# EAGLE board ROBOT_PI v9 (EAGLE 9.7.0)
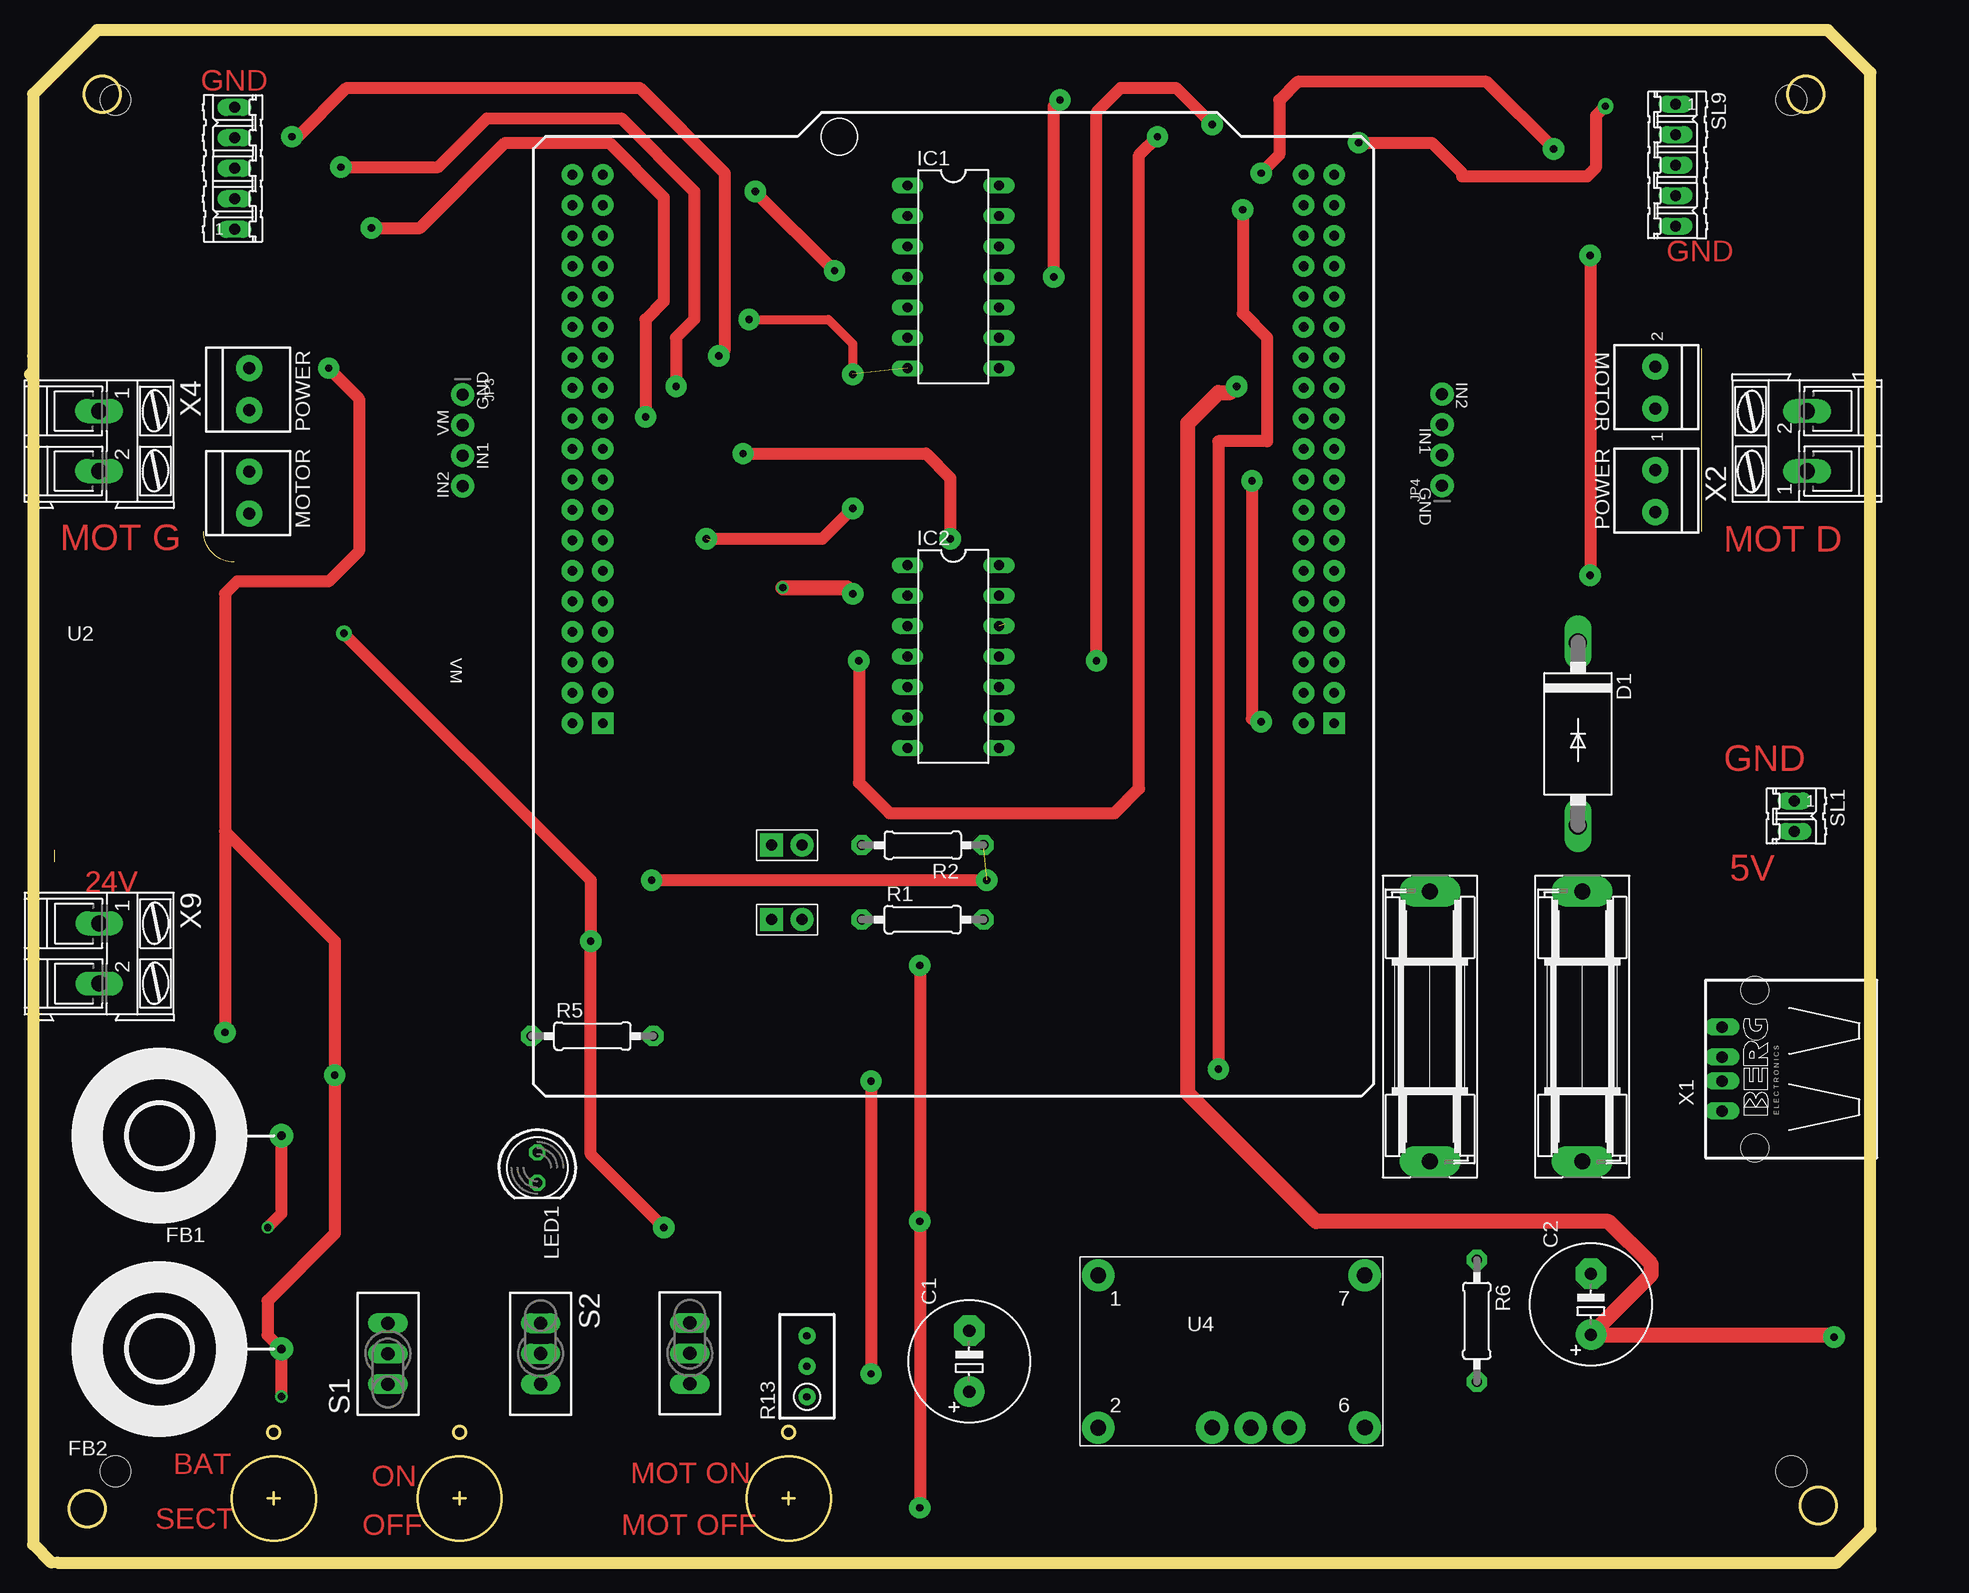
[diagram p0: board, top side]
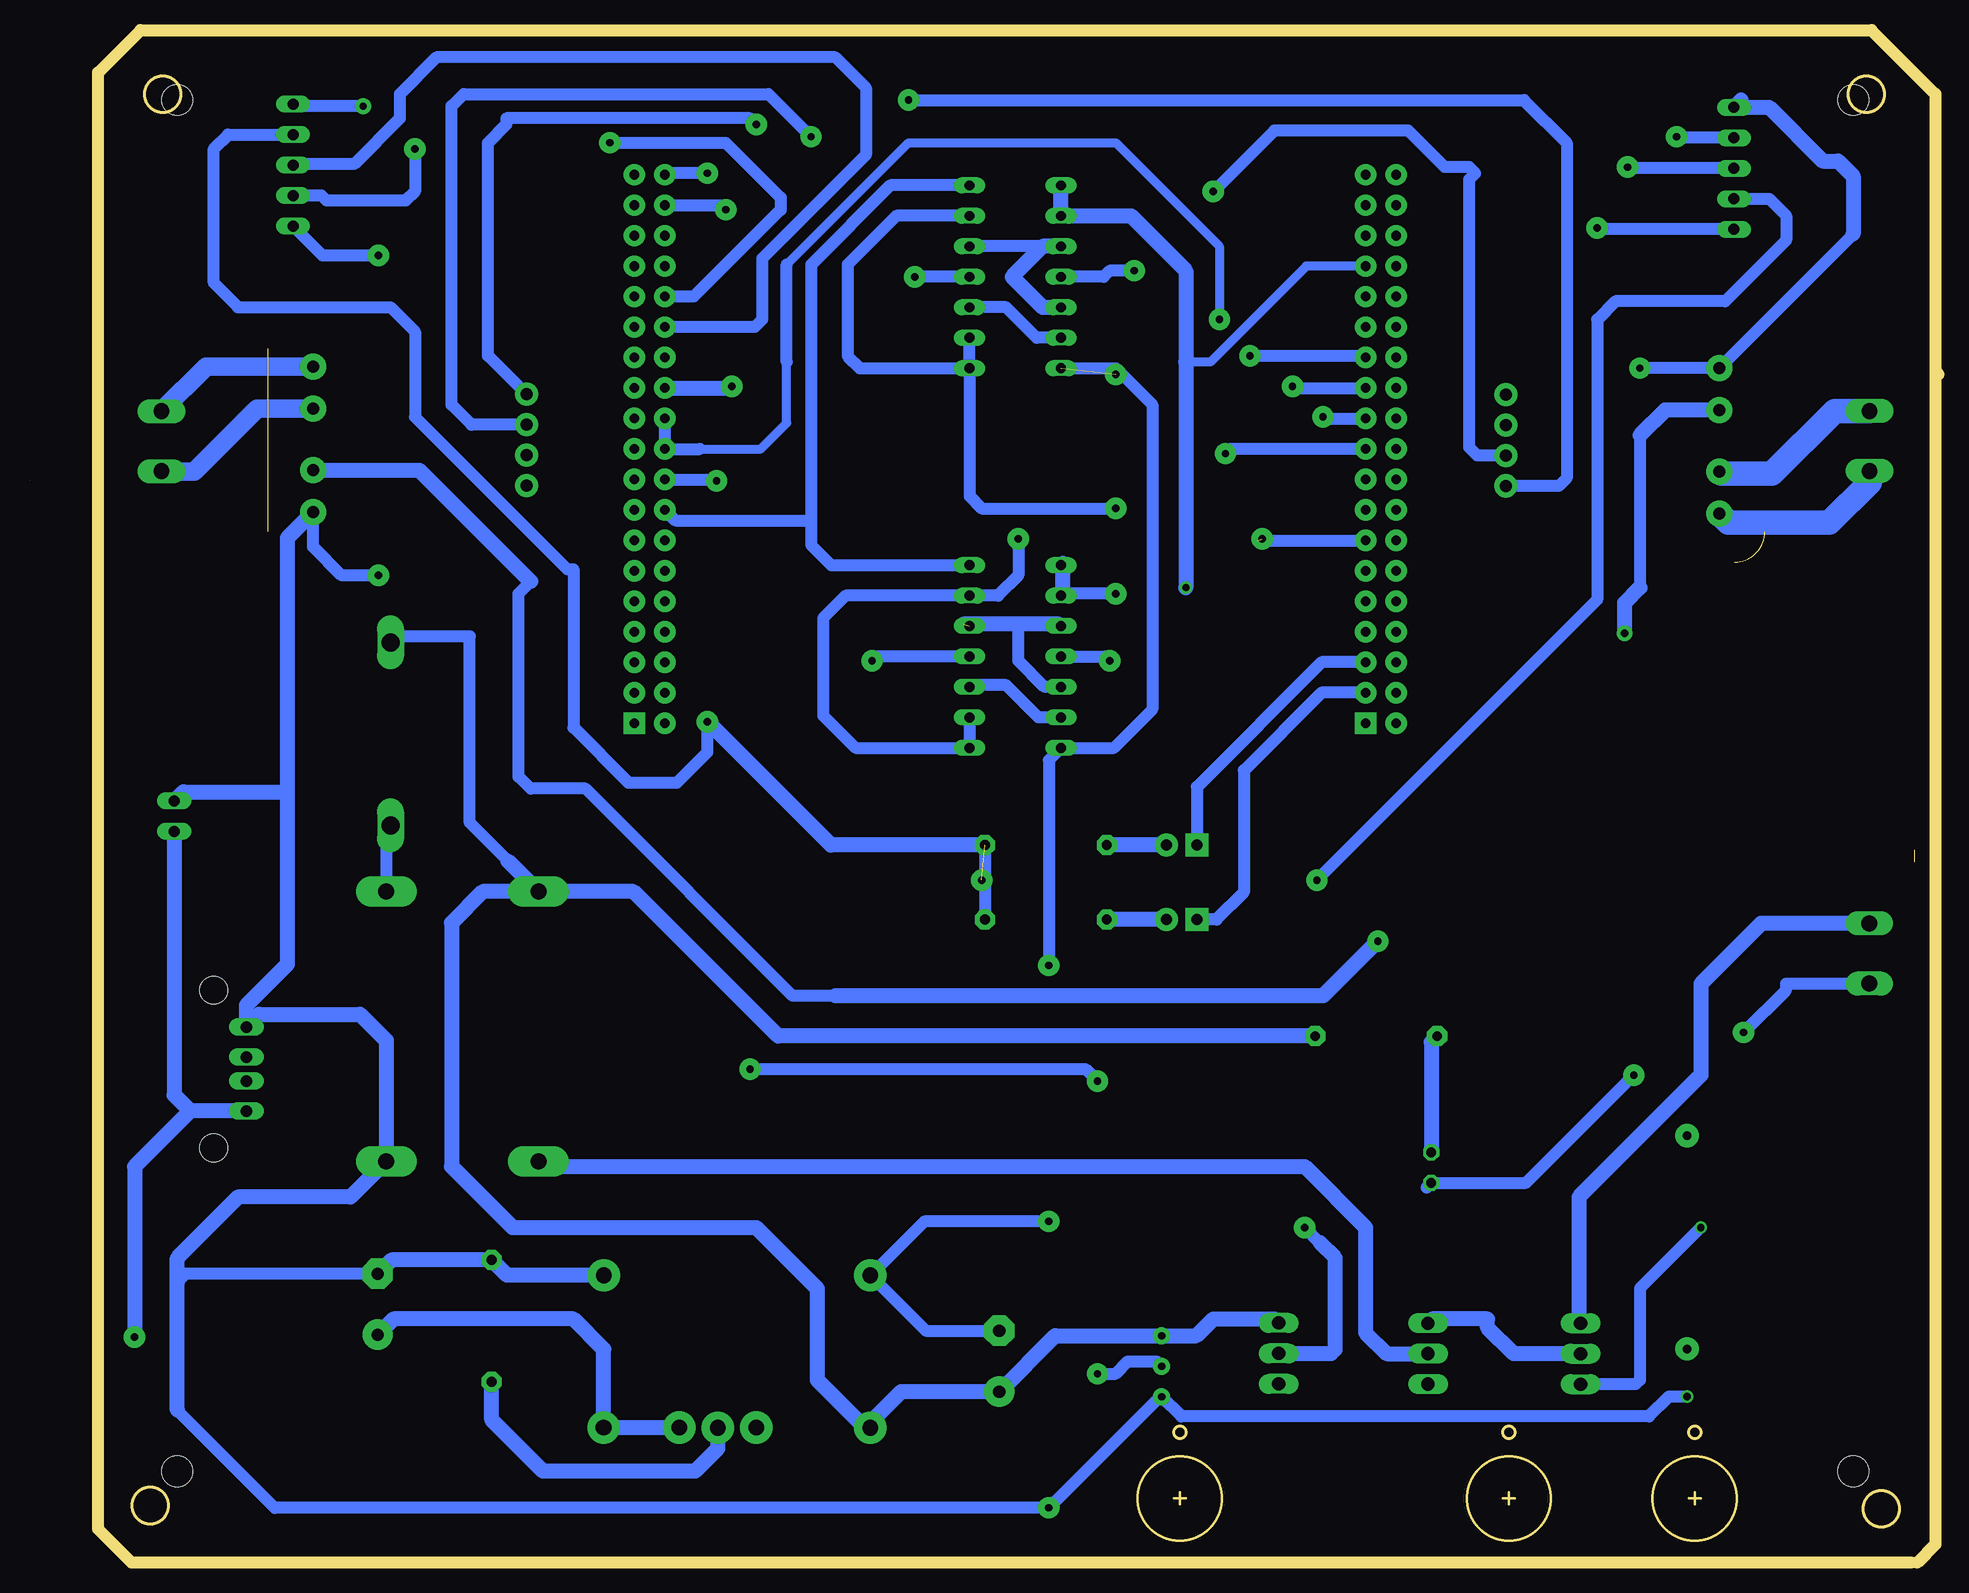
[diagram p1: board, bottom side, seen from below]

Size 153.42 x 127.76 mm. Coordinates in mm from the lower left corner, seen from the top.
Outline: 2.03,59.42 2.03,58.42
Outline: 17.01,83.41 arc-90 14.47,85.95
Outline: 139.29,101.21 139.29,85.97
Outline: 20.32,5.85 20.32,4.85
Outline: 19.82,5.35 20.82,5.35
Outline: 35.81,5.85 35.81,4.85
Outline: 35.31,5.35 36.31,5.35
Outline: 63.25,5.85 63.25,4.85
Outline: 62.75,5.35 63.75,5.35
Outline: 0.25,100.58 0.25,1.52 1.78,0
Outline: 2.29,0 150.62,0 153.42,2.79 153.42,124.21 149.86,127.76 5.59,127.76 0.25,122.43 0.25,99.31 0,99.06
Outline: circle at 6.03,122.42 radius 1.5
Outline: circle at 148.03,122.42 radius 1.5
Outline: circle at 149.05,4.76 radius 1.5
Outline: circle at 4.76,4.51 radius 1.5
Outline: circle at 20.32,5.35 radius 3.5
Outline: circle at 20.32,10.85 radius 0.5
Outline: circle at 35.81,5.35 radius 3.5
Outline: circle at 35.81,10.85 radius 0.5
Outline: circle at 63.25,5.35 radius 3.5
Outline: circle at 63.25,10.85 radius 0.5
Copper layers (1*16): Top / Bottom
Stack-up Default Layer Stack: Top User Defined 0.035mm / Dielectric-1 User Defined 1.5mm / Bottom User Defined 0.035mm
Design rules "default": minimum track width 10mil, minimum drill 24mil, track to track 8mil, track to pad 8mil, pad to pad 8mil, via to via 8mil, smd to smd 8mil, copper to edge 40mil, drill to drill 8mil, minimum pad ring 10mil, minimum via ring 8mil, stop-mask expansion 4mil, vias tented up to drill 0mil, thermal gap 10mil
Holes 2.54 mm at 146.81,7.62 7.11,7.62 7.11,121.92 146.81,121.92

## Footprints (pad centres in the part's own frame; a part is rotated, then mirrored left to right if it is on the bottom)
E5-10,5 = drill 1.016 pad 2.54: + -2.54,0 | drill 1.016 pad 2.54 octagon: - 2.54,0
CAVALIER = drill 0.9 pad 1.93 square: 1 -1.27,0 | drill 0.9 pad 1.93: 2 1.27,0
DO201-15 = drill 1.499 long: A 7.62,0; C -7.62,0
SH22,5 = drill 1.321 pad 2.54 long: 1 -11.252,0; 2 11.252,0
F_BANANE = drill 0.7 pad 1.93: P$1 -10.16,0
DIL14 = drill 0.813 long: 1 -7.62,-3.81; 2 -5.08,-3.81; 3 -2.54,-3.81; 4 0,-3.81; 5 2.54,-3.81; 6 5.08,-3.81; 7 7.62,-3.81; 8 7.62,3.81; 9 5.08,3.81; 10 2.54,3.81; 11 0,3.81; 12 -2.54,3.81; 13 -5.08,3.81; 14 -7.62,3.81
1X04_ROUND_76 = drill 1 pad 1.93: 1 -3.81,0; 2 -1.27,0; 3 1.27,0; 4 3.81,0
LED5MM = drill 0.813 octagon: A -1.27,0; K 1.27,0
0207/10 = drill 0.813 pad 1.676 octagon: 1 -5.08,0; 2 5.08,0
RTRIM3296W = drill 0.61 pad 1.422: 1 0,-2.54; 2 0,0; 3 0,2.54
TL3XPO = drill 1.1 pad 1.422 long: 1 -2.54,0; 2 0,0; 3 2.54,0
02P = drill 0.914 long: 1 -1.27,0; 2 1.27,0
05P = drill 0.914 long: 1 -5.08,0; 2 -2.54,0; 3 0,0; 4 2.54,0; 5 5.08,0
P_NUCLEO = drill 0.8 pad 1.778: +3V3 -29.21,-8.89; +5V -29.21,-11.43; AGND 31.75,-29.21; AVDD 29.21,1.27; BOOTO -31.75,1.27; E5V -29.21,3.81; GND -29.21,1.27; GND' -29.21,-16.51; GND'' -29.21,-13.97; GND''' -31.75,-13.97; IOREF -29.21,-3.81; NC -29.21,-21.59; P$18 -31.75,-3.81; P$19 -31.75,-1.27; P$27 -29.21,-1.27; P$48 29.21,-1.27; P$74 31.75,-34.29; P$76 31.75,-36.83; PA0 -29.21,-24.13; PA1 -29.21,-26.67; PA2 29.21,-34.29; PA3 29.21,-36.83; PA4 -29.21,-29.21; PA5 29.21,-3.81; PA6 29.21,-6.35; PA7 29.21,-8.89; PA8 29.21,-19.05; PA9 29.21,-16.51; PA10 29.21,-31.75; PA11 31.75,-6.35; PA12 31.75,-3.81; PA13 -31.75,-6.35; PA14 -31.75,-8.89; PA15 -31.75,-11.43; PB0 -29.21,-31.75; PB1 31.75,-19.05; PB2 31.75,-16.51; PB3 29.21,-29.21; PB4 29.21,-24.13; PB5 29.21,-26.67; PB6 29.21,-11.43; PB7 -31.75,-16.51; PB8 29.21,6.35; PB9 29.21,3.81; PB10 29.21,-21.59; PB12 31.75,-8.89; PB13 31.75,-26.67; PB14 31.75,-24.13; PB15 31.75,-21.59; PB110 31.75,-11.43; PB120 31.75,-13.97; PC0 -29.21,-36.83; PC1 -29.21,-34.29; PC2 -31.75,-34.29; PC3 -31.75,-36.83; PC4 31.75,-31.75; PC5 31.75,3.81; PC6 31.75,6.35; PC7 29.21,-13.97; PC8 31.75,8.89; PC11 -29.21,8.89; PC12 -31.75,6.35; PC13 -31.75,-19.05; PC14 -31.75,-21.59; PC15 -31.75,-24.13; PD2 -29.21,6.35; PD8 31.75,-1.27; PH0 -31.75,-26.67; PH1 -31.75,-29.21; RESET -29.21,-6.35; U5V 31.75,1.27; VBAT -31.75,-31.75; VDD -31.75,3.81; VIN -29.21,-19.05 | drill 0.8 pad 1.778 square: PC9 29.21,8.89; PC10 -31.75,8.89
PTN78060 = drill 1.3 pad 2.7: 1 -11.12,6.36; 2 -11.11,-6.35; 3 -1.6,-6.34; 4 1.61,-6.35; 5 4.8,-6.34; 6 11.12,-6.34; 7 11.11,6.36
PN87520 = drill 0.95 long: 1 -3.5,2.71; 2 -1,2.71; 3 1,2.71; 4 3.5,2.71 | hole 2.3: -6.57,0; 6.57,0
AK300/2 = drill 1.321 long: 1 -2.515,0; 2 2.489,0
TERMBLOCK_1X2-3.5MM = drill 1 pad 2.184: 1 1.8,0; 2 -1.7,0

## Placement (x,y rotation side)
C1  220u  [E5-10,5]  78.29,16.79 90 top
C2  220u  [E5-10,5]  130.11,21.54 90 top
CV1  [CAVALIER]  63.09,53.61 0 top
CV2  [CAVALIER]  63.09,59.81 0 top
D1  1N5624  [DO201-15]  129.03,69.09 270 top
F1  [SH22,5]  116.69,44.69 90 top
F2  [SH22,5]  129.39,44.69 90 top
FB1  SECTEUR  [F_BANANE]  10.8,35.59 180 top
FB2  SECTEUR  [F_BANANE]  10.8,17.81 180 top
IC1  4011N  [DIL14]  76.96,107.19 270 top
IC2  4011N  [DIL14]  76.96,75.54 270 top
JP3  [1X04_ROUND_76]  36.06,93.57 270 top
JP4  [1X04_ROUND_76]  117.7,93.59 90 top
LED1  24V  [LED5MM]  42.28,32.93 270 top
R1  3.3k  [0207/10]  74.41,53.61 0 top
R2  3.3k  [0207/10]  74.41,59.81 180 top
R5  2k  [0207/10]  46.87,43.89 0 top
R6  18k  [0207/10]  120.6,20.16 270 top
R13  22k  [RTRIM3296W]  64.76,16.37 0 top
S1  SECT/BAT  [TL3XPO]  29.84,17.42 90 top
S2  ON/OFF  [TL3XPO]  42.55,17.42 270 top
S3  MOT ON/OFF  [TL3XPO]  55,17.44 270 top
SL1  [02P]  147.07,62.23 270 top
SL8  [05P]  17.05,116.23 90 top
SL9  [05P]  137.17,116.5 270 top
U2  [P_NUCLEO]  76.96,78.87 180 top
U4  [PTN78060]  100.15,17.59 0 top
X1  [PN87520]  143.76,41.15 90 top
X2  [AK300/2]  148.13,93.5 90 top
X3  DCMOTOR  [TERMBLOCK_1X2-3.5MM]  18.28,89.25 270 top
X4  [AK300/2]  5.75,93.49 270 top
X5  POWER  [TERMBLOCK_1X2-3.5MM]  18.28,97.88 270 top
X6  DCMOTOR  [TERMBLOCK_1X2-3.5MM]  135.48,97.91 90 top
X7  POWER  [TERMBLOCK_1X2-3.5MM]  135.48,89.27 90 top
X9  BATTERIE  [AK300/2]  5.77,50.77 270 top

## Library data of the parts
C1 C2 R1 R2 R5 R6 R13 = rcl
CV1 CV2 FB1 FB2 U2 U4 = JL_Composants
D1 = diode
F1 F2 = fuse; MF: SCHURTER; MPN: 0031.8201; OC_FARNELL: 1162740; OC_NEWARK: 96F8317
IC1 IC2 = 40xx
JP3 JP4 X3 X5-X7 = microbuilder
LED1 = led
S1-S3 = switch
SL1 SL8 SL9 = con-amp-quick; OC_FARNELL: unknown; OC_NEWARK: unknown
X1 = con-berg; OC_FARNELL: unknown; OC_NEWARK: unknown
X2 X4 X9 = con-ptr500; OC_FARNELL: unknown; OC_NEWARK: unknown

## Nets
6: U2.E5V
8: U2.GND
9A: U2.P$48
20A: U2.P$76
22: U2.GND'''
32A: U2.AGND
+3V3: IC1.14 IC2.14 U2.+3V3
+5V: R1.2 R2.1 SL8.2 SL9.2 U2.+5V
+24V: C1.+ D1.C F1.2 R5.2 R13.3 S3.1 U4.2
ALIM_MOT: S3.2 X5.1 X7.1
ENABLE_MOT: IC1.1 IC1.2 IC2.1 IC2.2 U2.PB3
ENC-IX-D: SL8.4 U2.PB10
GND: C1.- C2.- F2.1 FB2.P$1 IC1.7 IC2.7 LED1.K R6.1 R13.1 SL1.1 SL8.5 SL9.5 U2.GND' U2.GND'' U4.1 U4.7 X1.4 X5.2 X7.2 X9.2
IN1_L: IC1.4 JP3.3
IN1_R: IC2.4 JP4.3
IN2_L: IC1.11 JP3.4
IN2_R: IC2.11 JP4.4
MES_BATTERIE: R13.2 U2.PC1
N$1: X3.1 X4.2
N$4: X3.2 X4.1
N$5: X2.1 X6.2
N$6: X2.2 X6.1
N$8: F1.1 S2.2
N$10: IC1.6 IC1.10
N$11: CV1.1 U2.PB8
N$12: CV2.1 U2.PB9
N$13: D1.A F2.2
N$14: IC1.3 IC1.5 IC1.12
N$22: IC2.3 IC2.5 IC2.12
N$34: IC2.6 IC2.10
N$37: SL8.1 U2.PA9
N$39: SL8.3 U2.PA8
N$44: SL9.1 U2.PA1
N$47: SL9.3 U2.PA0
N$48: SL9.4 U2.PC0
N$56: CV1.2 R1.1
N$57: CV2.2 R2.2
N$71: LED1.A R5.1
N$74: S1.2 S2.1
N$78: S1.3 X9.1
N$79: FB1.P$1 S1.1
N$107: R6.2 U4.4
PHASE_LEFT: IC1.8 IC1.9 IC1.13 U2.PA6
PHASE_RIGHT: IC2.8 IC2.9 IC2.13 U2.PC7
VIN: C2.+ SL1.2 U2.VIN U4.5 U4.6 X1.1

## Tracks (layer width: path | path; a pad name or v marks a point on that pad's centre or on a via)
+3V3
  Bottom 1.016: IC1.14 87.38,114.81 93.98,108.2 93.98,86.87 | 93.98,86.87 93.98,84.84 92.3,83.16 IC2.14 | U2.+3V3 105.28,86.87 93.98,86.87
+5V  (via drill 0.61 pad 1.78)  (1 unrouted)
  Top 1.016: v101.85,90.17 101.85,70.36 102.11,70.1 v102.62,70.1 | v51.82,56.9 v79.76,56.9
  Bottom 1.016: R2.1 R1.2 | U2.+5V 102.23,90.3 102.11,90.42 v101.85,90.17 | SL8.2 14.12,113.69 12.7,112.27 12.7,110.24 17.78,105.16 26.92,105.16 28.45,103.63 28.45,80.26 v51.82,56.9 | v102.62,70.1 102.62,67.56 105.16,65.02 109.22,65.02 113.79,69.6 113.79,82.8 114.3,82.8 127,95.5 127,102.62 129.03,104.65 141.73,104.65 143.76,106.68 143.76,117.86 142.58,119.04 SL9.2
  Bottom 1.27: R2.1 92.33,59.82 v102.62,70.1
+24V
  Bottom 1.016: 119.23,58.49 122.43,61.68 122.43,77.22 128.52,77.22 D1.C
  Bottom 1.27: F1.2 119.23,58.49 | F1.2 121.34,55.95 123.95,53.34 123.95,33.02 118.87,27.94 98.55,27.94 93.47,22.86 93.47,15.24 89.47,11.24 | 89.47,11.24 U4.2 | 89.47,11.24 86.47,14.25 C1.+ 73.63,18.91 R13.3 61.86,18.91 60.45,20.32 55.34,20.32 S3.1 | R5.2 96.72,43.89 108.78,55.95 F1.2
ALIM_MOT  (via drill 0.61 pad 1.3, 0.61 pad 1.78)
  Top 1.016: v52.83,27.94 46.74,34.04 v46.74,51.82 46.74,56.9 v26.16,77.47
  Bottom 0.254: 24.89,82.26 24.89,81.28
  Bottom 1.016: 24.89,93.98 24.89,81.28 | 91.95,47.24 95.5,47.24 112.78,64.52 117.35,64.52 118.36,65.53 118.36,80.77 117.35,81.79 | 51.56,26.67 v52.83,27.94
  Bottom 1.27: X5.1 22.79,96.09 24.89,93.98 | S3.2 50.63,17.44 50.29,17.78 50.29,25.4 51.56,26.67 | v26.16,77.47 26.16,80.01 24.89,81.28 | X7.1 126.63,91.07 117.35,81.79 | 91.95,47.24 51.31,47.24 v46.74,51.82
ENABLE_MOT  (via drill 0.61, 0.61 pad 1.78)
  Top 1.27: v62.74,81.28 68.07,81.28 v68.58,80.77
  Bottom 0.762: U2.PB3 52.7,108.08 60.71,100.08 62.74,100.08
  Bottom 1.016: IC1.1 | v68.58,80.77 73,80.77
  Bottom 1.27: IC2.1 73,83.31 73,80.77 IC2.2 | IC1.1 IC1.2 67.31,112.27 62.74,107.7 62.74,100.08 v62.74,81.28
ENC-IX-D  (via drill 0.61 pad 1.78)
  Top 1.016: v21.84,118.87 22.35,118.87 26.42,122.94 50.8,122.94 57.91,115.82 57.91,101.09 v57.4,100.58 57.28,100.46
  Bottom 1.016: SL8.4 21.74,118.77 v21.84,118.87 | U2.PB10 47.88,100.58 v57.4,100.58
GND  (via drill 0.61, 0.61 pad 1.78)  (1 unrouted)
  Top 0.762: v59.94,103.63 66.55,103.63 68.58,101.6 v68.58,99.06
  Top 1.016: v20.96,13.84 FB2.P$1 19.81,18.96 19.81,21.84 25.4,27.43 v25.4,40.64 25.4,51.82 16.26,60.96 | v74.17,49.78 v74.17,28.45 v74.17,4.57 | v130.05,108.97 v130.05,82.3 | v24.89,99.57 27.43,97.03 27.43,84.33 24.89,81.79 17.27,81.79 16.26,80.77 16.26,60.96 | 16.26,60.96 v16.26,44.2
  Bottom 0.762: 96.01,108.2 85.85,118.36 68.58,118.36 59.94,109.73 v59.94,103.63 | 103.25,92.84 98.17,92.84 96.01,95 96.01,100.08
  Bottom 1.016: 42.67,31.27 LED1.K 34.38,31.66 v25.4,40.64 | 7.11,110.75 X5.2 24.88,99.59 v24.89,99.57 | 73.5,67.56 IC2.7 | IC2.7 68.74,67.92 65.53,71.12 65.53,96.52 68.58,99.57 IC1.7 | IC2.7 74.17,66.9 v74.17,49.78 | v74.17,28.45 84.53,28.45 U4.1 84.41,19.33 C1.- | 146.81,12.7 138.68,4.57 v74.17,4.57 64.91,13.83 R13.1 63.12,12.19 24.13,12.19 22.48,13.84 v20.96,13.84 | C2.- 146.1,24.08 146.81,23.37 | v130.05,82.3 133.1,82.3 135.48,84.68 X7.2 | v16.26,44.2 12.7,47.75 12.7,48.26 12.68,48.28 X9.2 | U2.GND' U2.GND'' 103.25,92.84 | 96.01,100.08 96.01,108.2 | v130.05,108.97 134.71,108.97 SL9.5
  Bottom 1.27: 146.81,12.7 146.81,23.37 146.81,25.4 141.73,30.48 132.36,30.48 F2.1 129.4,43.54 131.57,45.72 139.98,45.72 X1.4 141.05,46.47 137.64,49.88 137.64,64.26 | U4.7 119.32,23.95 R6.1 128.95,25.24 C2.- | 16.44,121.92 SL8.5 14.12,121.31 9.65,116.84 8.36,116.84 7.11,115.59 7.11,110.75 | X7.2 137.64,85.41 137.64,64.26 | SL1.1 146.3,64.26 137.64,64.26
IN1_L  (via drill 0.61 pad 1.78)
  Top 1.016: v60.45,114.3 v67.06,107.7
  Bottom 1.016: v60.45,114.3 55.37,119.38 44.2,119.38 41.15,116.33 39.12,116.33 38.61,115.82 39.12,115.32 39.12,92.96 38.45,92.3 JP3.3 | v67.06,107.7 69.09,107.7 69.6,107.19 IC1.4
IN1_R  (via drill 0.61 pad 1.78)
  Top 1.016: v69.09,75.18 69.09,65.02 71.63,62.48 90.42,62.48 92.46,64.52 92.46,117.35 v93.98,118.87
  Bottom 1.016: JP4.3 122.29,94.86 123.95,96.52 123.95,121.41 122.94,122.43 97.54,122.43 v93.98,118.87 | IC2.4 69.44,75.54 v69.09,75.18
IN2_L  (via drill 0.61 pad 1.78)
  Top 1.016: v85.34,107.19 85.34,121.41 v85.85,121.92
  Bottom 1.016: v85.85,121.92 34.54,121.92 30.99,118.36 30.99,90.42 31.66,89.76 JP3.4 | IC1.11 v85.34,107.19
IN2_R  (via drill 0.61 pad 1.78)
  Top 1.016: v88.9,75.18 88.9,120.9 90.93,122.94 95.5,122.94 v98.55,119.89
  Bottom 1.016: JP4.4 120.9,100.6 120.9,118.36 119.38,119.89 119.38,120.4 99.06,120.4 v98.55,119.89 | IC2.11 88.55,75.54 v88.9,75.18
MES_BATTERIE  (via drill 0.61 pad 1.78)
  Top 1.016: v101.09,112.78 101.09,104.14 103.12,102.11 103.12,93.47 99.06,93.47 v99.06,41.15 | v70.1,40.13 v70.1,15.75
  Bottom 1.016: U2.PC1 101.47,113.16 v101.09,112.78 | v99.06,41.15 71.12,41.15 v70.1,40.13 | v70.1,15.75 68.58,15.75 67.56,16.76 65.16,16.76 R13.2
N$1
  Bottom 2.032: X4.2 5.75,90.02 9.09,86.68 17.52,86.68 X3.1
N$4
  Bottom 2.032: X4.1 8.66,96 13.9,90.76 18.1,90.76 X3.2
N$5
  Bottom 1.524: X6.2 140.13,96.21 145.41,90.93 148.08,90.93 X2.1
N$6
  Bottom 1.524: X6.1 144.41,99.71 X2.2
N$8
  Bottom 1.27: S2.2 46,17.42 47.75,19.18 47.75,27.94 52.83,33.02 116.33,33.02 116.69,33.38 F1.1
N$10
  Bottom 1.016: IC1.6 75.18,102.11 77.72,104.65 IC1.10
N$11
  Bottom 1.016: U2.PB8 51.44,72.52 57.91,66.04 57.91,55.88 60.19,53.61 CV1.1
N$12
  Bottom 1.016: U2.PB9 51.44,75.06 61.82,64.67 CV2.1
N$13
  Bottom 1.016: D1.A 129.4,61.11 F2.2
N$14
  Bottom 1.016: IC1.3 IC1.12
  Bottom 1.27: IC1.3 74.68,109.73 77.22,107.19 74.67,104.65 IC1.5
N$22  (1 unrouted)
  Bottom 1.016: IC2.5 74.52,73 76.71,75.18 76.71,78.23
  Bottom 1.27: IC2.3 73.31,78.23 76.71,78.23 81.28,78.23
N$34
  Bottom 1.016: IC2.6 75.03,70.46 77.72,73.15 80.62,73.15 IC2.10
N$37  (via drill 0.61 pad 1.78)
  Top 1.016: v28.45,111.25 32.51,111.25 39.62,118.36 48.26,118.36 52.83,113.79 52.83,105.16 51.31,103.63 v51.31,95.5
  Bottom 1.016: SL8.1 28.34,111.15 v28.45,111.25 | v51.31,95.5 51.18,95.38 U2.PA9
N$38
  Bottom 0: 159.07,90.2 159.09,90.21
N$39  (via drill 0.61 pad 1.78)
  Top 1.016: v25.91,116.33 34.04,116.33 38.1,120.4 49.28,120.4 55.37,114.3 55.37,103.63 53.85,102.11 v53.85,98.04
  Bottom 1.016: SL8.3 25.8,116.23 v25.91,116.33 | v53.85,98.04 53.72,97.92 U2.PA8
N$44  (via drill 0.61 pad 1.3, 0.61 pad 1.78)
  Top 1.016: v110.74,118.36 116.84,118.36 119.38,115.82 119.38,115.57 129.79,115.57 130.56,116.33 130.56,120.65 v131.32,121.41
  Bottom 1.016: U2.PA1 103.76,105.54 96.52,112.78 96.52,113.79 101.09,118.36 v110.74,118.36 | v131.32,121.41 137,121.41 SL9.1
N$47
  Bottom 1.016: U2.PA0 98.68,103 98.04,103.63 98.04,108.71 89.41,117.35 89.41,122.94 91.95,125.48 125.22,125.48 128.27,122.43 128.27,120.4 132.08,116.59 137.67,116.59 137.59,116.5 SL9.3
N$48  (via drill 0.61 pad 1.78)
  Top 1.016: v127,117.86 121.41,123.44 105.66,123.44 104.14,121.92 104.14,117.35 v102.62,115.82
  Bottom 1.016: v102.62,115.82 106.05,115.82 U2.PC0 | v127,117.86 127,114.3 127.76,113.54 134.37,113.54 134.79,113.96 SL9.4
N$56
  Bottom 1.27: CV1.2 R1.1
N$57
  Bottom 1.27: CV2.2 R2.2
N$71
  Bottom 1.27: R5.1 42.28,43.4 LED1.A
N$74
  Bottom 1.27: S1.2 35.41,17.42 37.59,19.59 37.59,20.32 42.2,20.32 S2.1
N$78
  Bottom 1.27: X9.1 14.79,53.29 19.81,48.26 19.81,40.64 29.97,30.48 29.97,20.09 S1.3
N$79  (via drill 0.61)
  Top 1.016: FB1.P$1 20.96,29.09 v19.81,27.94
  Bottom 1.016: v19.81,27.94 24.89,22.86 24.89,15.24 25.25,14.88 S1.1
N$107
  Bottom 1.27: U4.4 101.76,9.49 103.63,7.62 116.33,7.62 120.6,11.89 R6.2
PHASE_LEFT  (via drill 0.61 pad 1.78)  (1 unrouted)
  Top 1.016: v68.58,87.88 66.04,85.34 v56.39,85.34
  Bottom 1.016: IC1.8 IC1.9 | IC1.13 86.87,112.27 90.93,108.2 90.93,100.58 89.91,99.57 IC1.8 | IC1.8 80.77,88.9 79.76,87.88 v68.58,87.88 | 56.77,85.22 U2.PA6
PHASE_RIGHT  (via drill 0.61 pad 1.78)
  Top 1.016: v59.44,92.46 74.68,92.46 76.71,90.42 v76.71,85.34
  Bottom 1.016: IC2.9 IC2.8 90.27,67.92 92.96,70.61 92.96,78.74 91.09,80.62 IC2.13 78.39,80.62 76.71,82.3 v76.71,85.34 | U2.PC7 59.06,92.84 v59.44,92.46
VIN  (via drill 0.61 pad 1.78)
  Top 1.27: v150.37,18.8 150.17,19 C2.+ 135.13,24.02 135.13,24.89 131.57,28.45 107.19,28.45 96.52,39.12 96.52,95 99.06,97.54 100.08,97.54 v100.58,98.04
  Bottom 1.27: C2.+ 128.78,20.32 113.79,20.32 111.27,17.8 U4.6 U4.5 | X1.1 145.74,37.65 | 145.74,37.65 150.37,33.02 v150.37,18.8 | U2.VIN 100.71,97.92 v100.58,98.04 | SL1.2 147.07,38.97 145.74,37.65

## Text on the board
Top: GND | GND | MOT G | MOT D | GND | 5V | 24V | 24V | BAT | ON | MOT ON | SECT | OFF | MOT OFF
tPlace: 2 | POWER | MOTOR | IN2 | GND | VM | IN1 | 1 | IN1 | GND | IN2 | MOTOR | POWER | VM